# EAGLE board CON_Board_v2 (EAGLE 7.3.0)
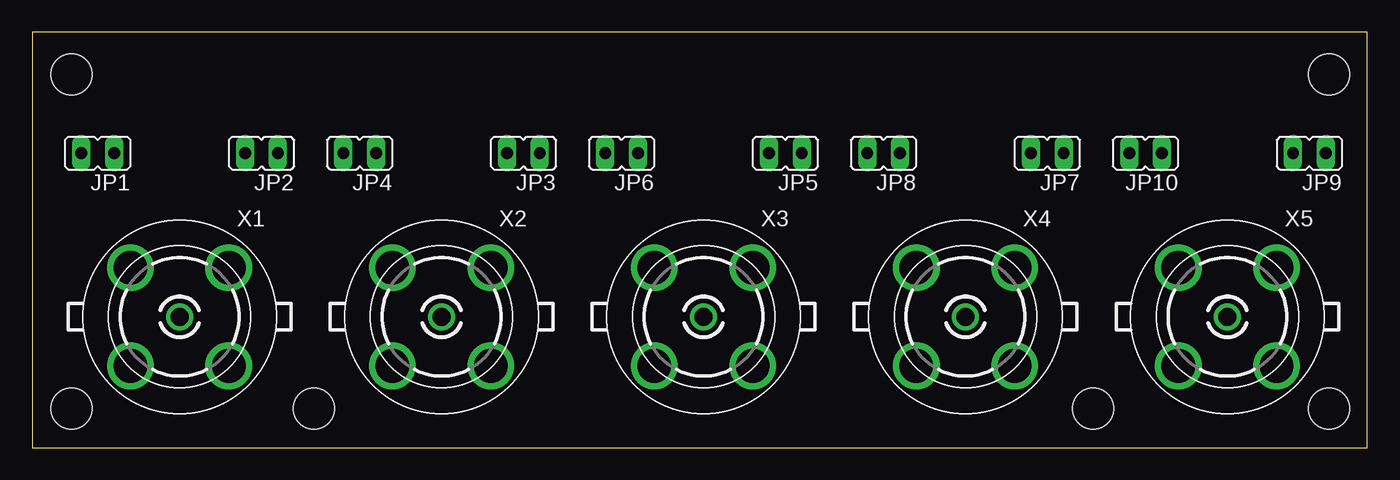
[diagram p0: board, top side]
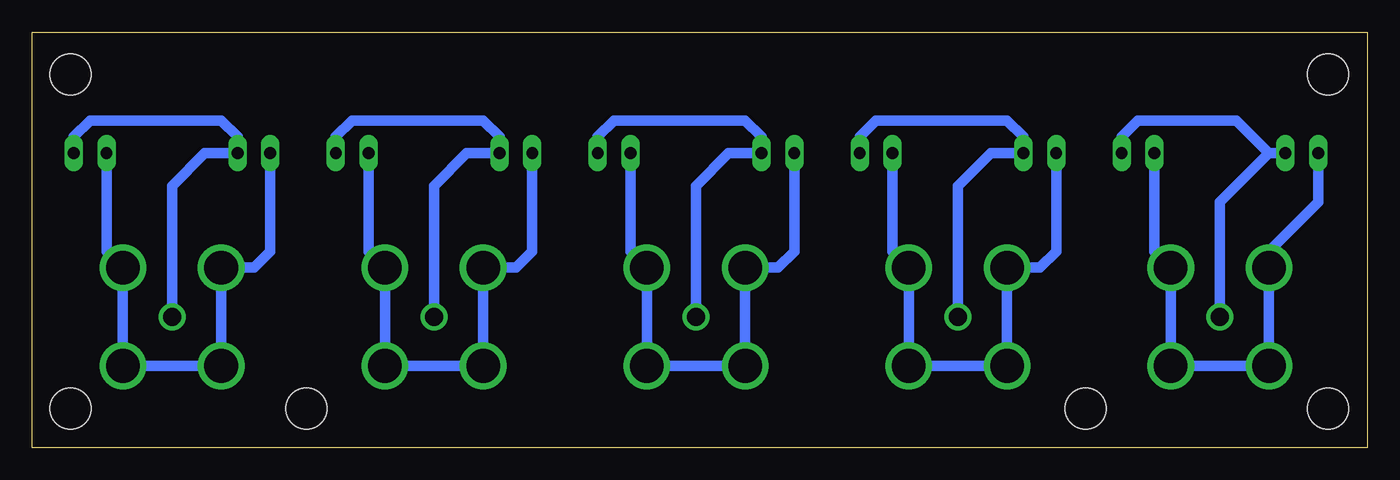
[diagram p1: board, bottom side, seen from below]

Size 103.56 x 32.25 mm. Coordinates in mm from the lower left corner, seen from the top.
Outline: 0,0 103.56,0 103.56,32.25 0,32.25 0,0
Copper layers (1*16): Top 0.035mm / dielectric 1.5mm / Bottom 0.035mm
Design rules "default": minimum track width 10mil, minimum drill 24mil, track to track 8mil, track to pad 8mil, pad to pad 8mil, via to via 8mil, smd to smd 8mil, copper to edge 40mil, drill to drill 8mil, minimum pad ring 10mil, minimum via ring 8mil, stop-mask expansion 4mil, vias tented up to drill 0mil, thermal gap 10mil
Holes 3.2 mm at 3.05,3.05 21.84,3.05 82.3,3.05 100.58,3.05 3.05,28.96 100.58,28.96

## Footprints (pad centres in the part's own frame; a part is rotated, then mirrored left to right if it is on the bottom)
JP1 = drill 0.914 long: 1 0,-1.27; 2 0,1.27
31-5329 = drill 1.4: 1 0,0 | drill 2.6: 2 3.81,3.81; 3 -3.81,3.81; 4 -3.81,-3.81; 5 3.81,-3.81

## Placement (x,y rotation side)
JP1  [JP1]  5.08,22.86 90 top
JP2  [JP1]  17.78,22.86 90 top
JP3  [JP1]  38.1,22.86 90 top
JP4  [JP1]  25.4,22.86 90 top
JP5  [JP1]  58.42,22.86 90 top
JP6  [JP1]  45.72,22.86 90 top
JP7  [JP1]  78.74,22.86 90 top
JP8  [JP1]  66.04,22.86 90 top
JP9  [JP1]  99.06,22.86 90 top
JP10  [JP1]  86.36,22.86 90 top
X1  COAX  [31-5329]  11.43,10.16 0 top
X2  COAX  [31-5329]  31.75,10.16 0 top
X3  COAX  [31-5329]  52.07,10.16 0 top
X4  COAX  [31-5329]  72.39,10.16 0 top
X5  COAX  [31-5329]  92.71,10.16 0 top

## Library data of the parts
JP1-JP10 = jumper
X1-X5 = Amphenol-coax-connector; OC_FARNELL: unknown; OC_NEWARK: unknown

## Nets
N$1: JP1.1 JP2.1 X1.1
N$2: JP1.2 JP2.2 X1.2 X1.3 X1.4 X1.5
N$3: JP3.1 JP4.1 X2.1
N$4: JP3.2 JP4.2 X2.2 X2.3 X2.4 X2.5
N$5: JP5.1 JP6.1 X3.1
N$6: JP5.2 JP6.2 X3.2 X3.3 X3.4 X3.5
N$7: JP7.1 JP8.1 X4.1
N$8: JP7.2 JP8.2 X4.2 X4.3 X4.4 X4.5
N$9: JP9.1 JP10.1 X5.1
N$10: JP9.2 JP10.2 X5.2 X5.3 X5.4 X5.5

## Tracks (layer width: path | path; a pad name or v marks a point on that pad's centre or on a via)
N$1
  Bottom 0.813: 7.62,22.86 11.43,19.05 X1.1 | JP1.1 7.62,22.86 | 7.62,22.86 10.16,25.4 17.78,25.4 19.05,24.13 JP2.1
N$2
  Bottom 0.813: JP1.2 3.81,19.05 7.62,15.24 X1.3 X1.4 X1.5 X1.2 16.51,15.24 JP2.2
N$3
  Bottom 0.813: JP3.1 39.37,24.13 38.1,25.4 27.94,25.4 26.67,24.13 JP4.1 29.21,22.86 31.75,20.32 X2.1
N$4
  Bottom 0.813: JP3.2 36.83,15.24 X2.2 X2.5 X2.4 X2.3 25.4,13.97 24.13,15.24 JP4.2
N$5
  Bottom 0.813: JP5.1 59.69,24.13 58.42,25.4 48.26,25.4 46.99,24.13 JP6.1 49.53,22.86 52.07,20.32 X3.1
N$6
  Bottom 0.813: JP5.2 57.15,15.24 X3.2 X3.5 X3.4 X3.3 45.72,13.97 44.45,15.24 JP6.2
N$7
  Bottom 0.813: JP7.1 80.01,24.13 78.74,25.4 68.58,25.4 67.31,24.13 JP8.1 69.85,22.86 72.39,20.32 X4.1
N$8
  Bottom 0.813: JP7.2 77.47,15.24 X4.2 X4.5 X4.4 X4.3 66.04,13.97 64.77,15.24 JP8.2
N$9
  Bottom 0.813: JP9.1 100.33,24.13 99.06,25.4 88.9,25.4 87.63,24.13 JP10.1 90.17,22.86 92.71,20.32 X5.1
N$10
  Bottom 0.813: JP9.2 97.79,15.24 X5.2 X5.5 X5.4 X5.3 86.36,13.97 85.09,15.24 JP10.2